# Altium PCB EB2_Cyclone_1_03.PcbDoc (part 4 of 4)
Units mm, origin at the board's own origin, x right, y up, seen from the top; angles counter-clockwise.
Board outline 165.1 x 115.01 mm, 6 copper layers (Top Layer, MidLayer1, VCC Plane, GND Plane, MidLayer2, Bottom Layer); 336 components, 379 nets, 1581 pads, 731 vias.
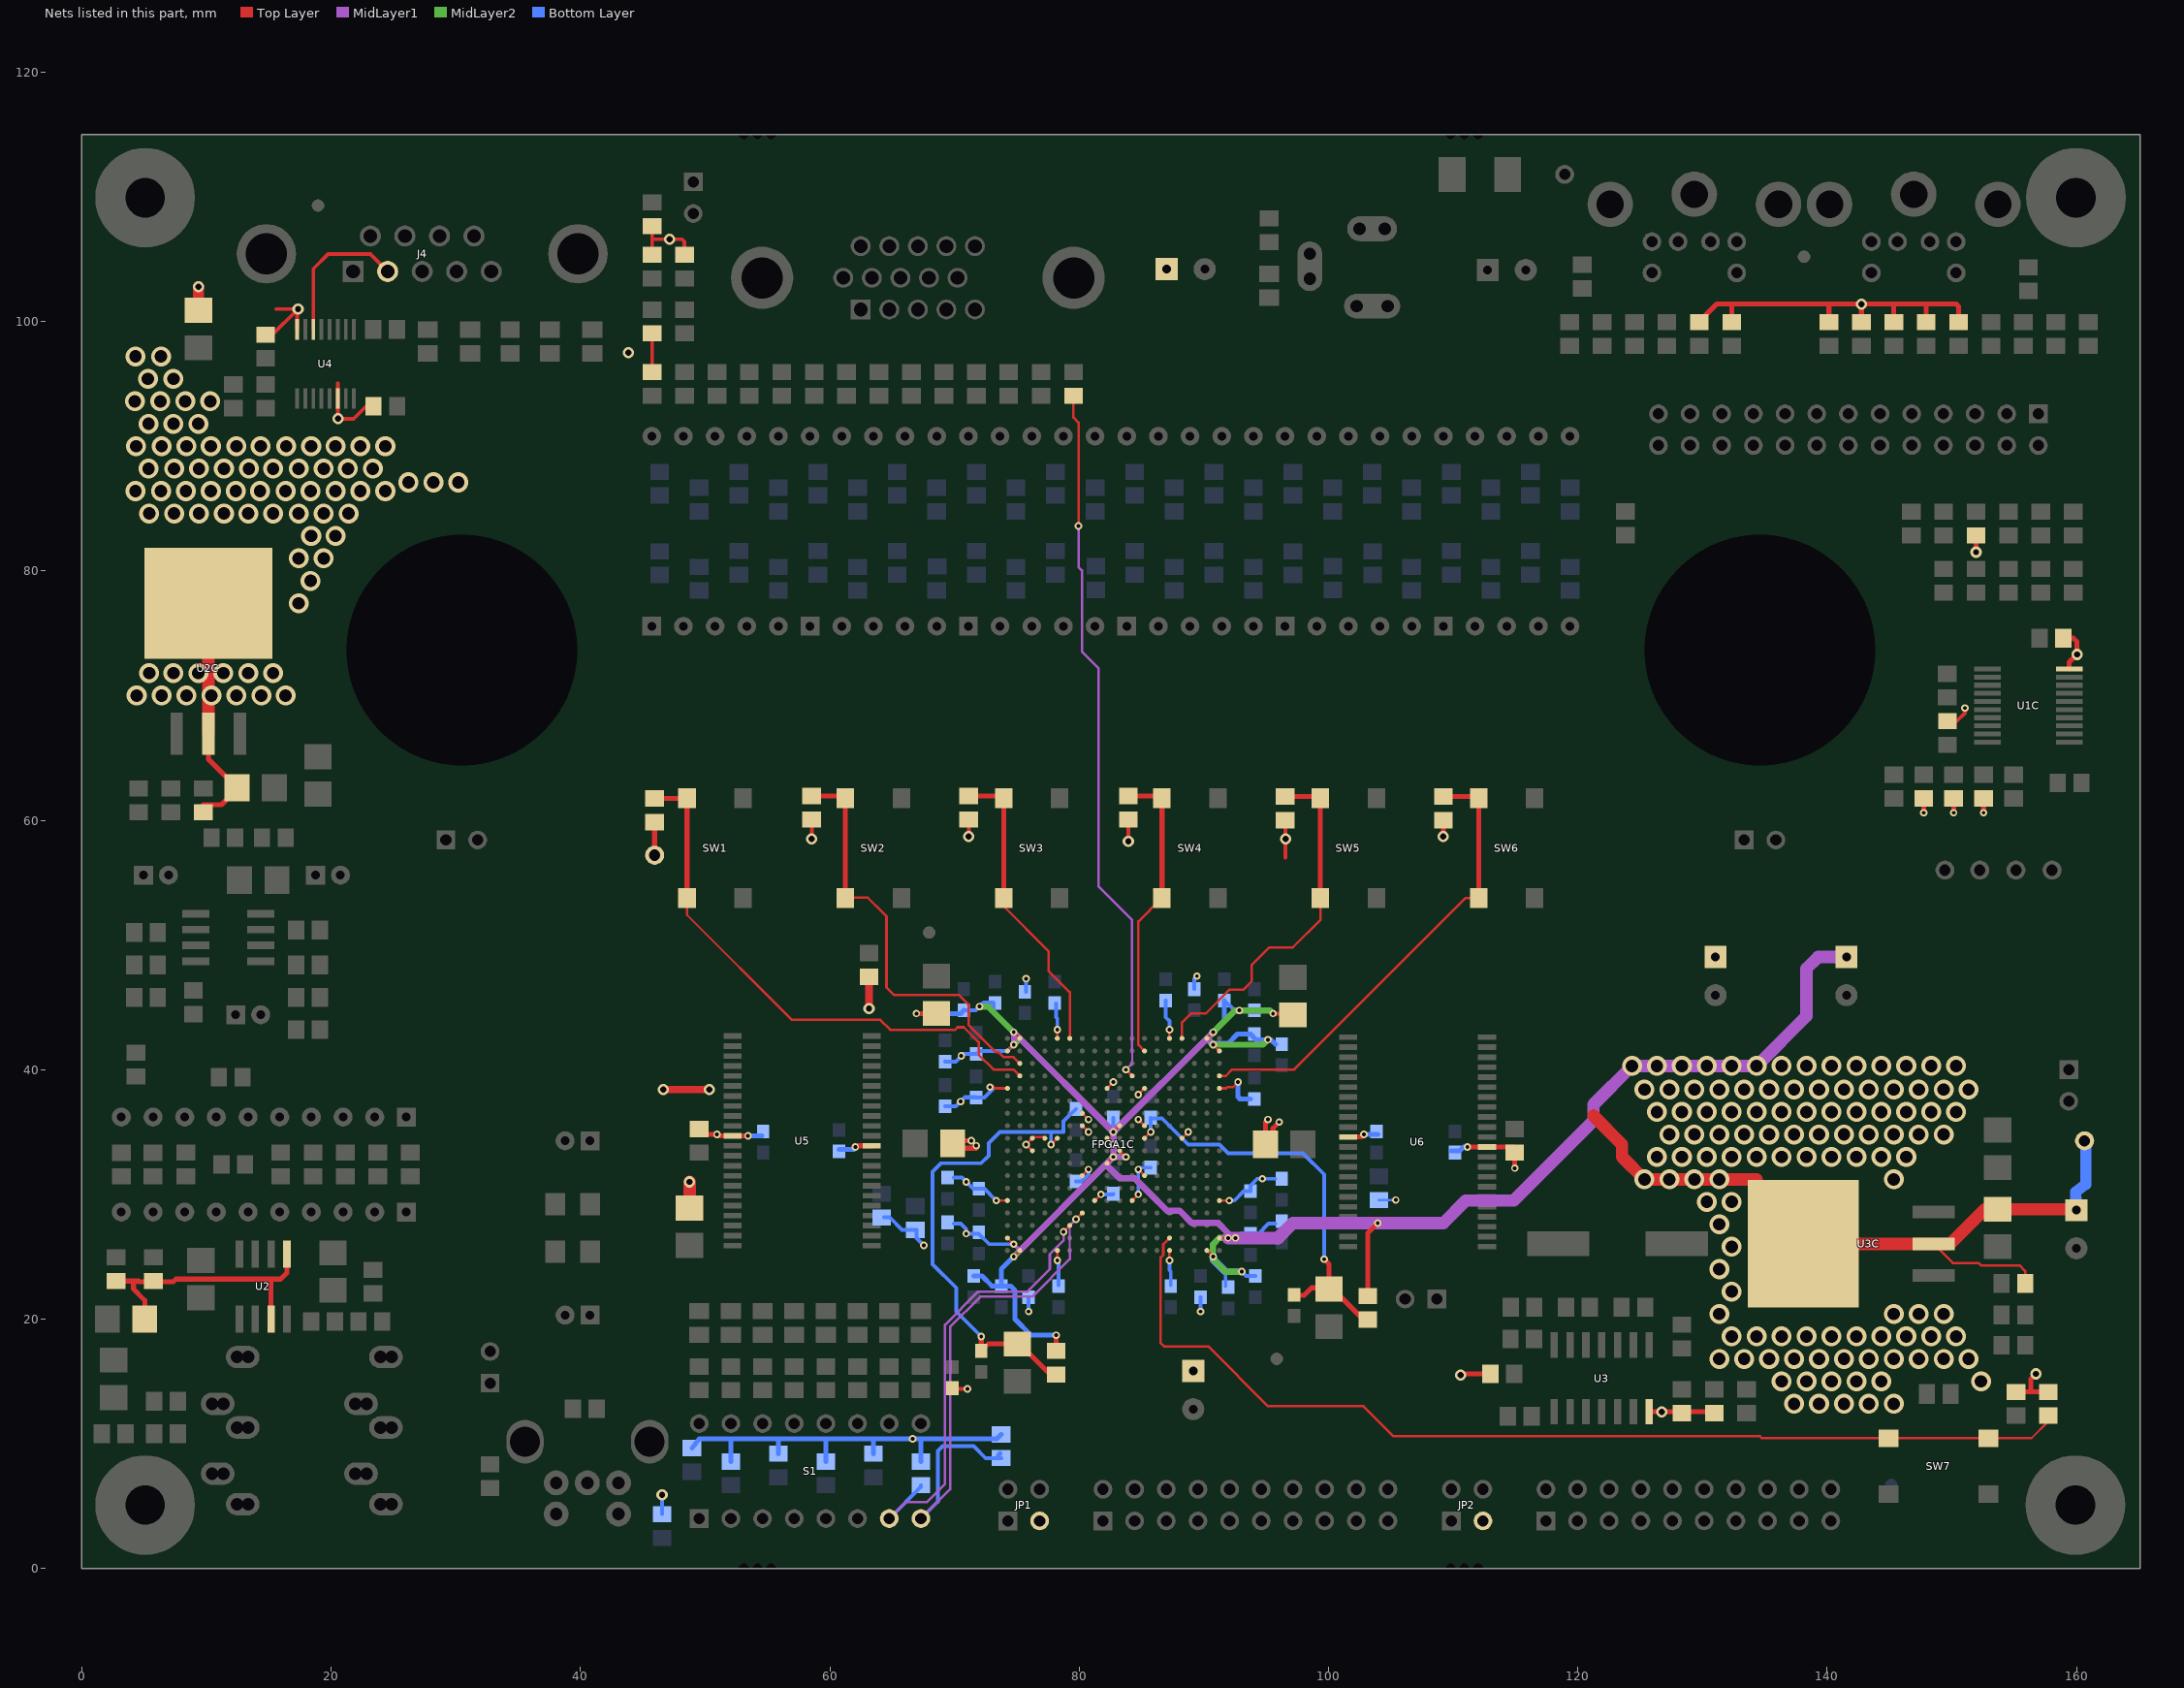
[diagram p8: the nets of this part, all layers, seen from the top]

## Via types
v1: diameter 0.6, hole 0.3, Top Layer to Bottom Layer, tented both sides, 433 vias
v2: diameter 1.6, hole 1, Top Layer to Bottom Layer, 191 vias
v3: diameter 0.9, hole 0.5, Top Layer to Bottom Layer, tented both sides, 105 vias
v4: diameter 1.27, hole 0.7, Top Layer to Bottom Layer, tented both sides, 2 vias

## Nets (pads, with @x,y where several pads share a name; then routed paths per layer and width w, separated by ;. In a path a pad name is that pad's centre, name@x,y a point inside that pad or via, vN(x,y) a via of type N, cw(c..) or ccw(c..) an arc to the next point about the centre after c; other vN are vias at no path point) (continued)
SW_DIP6: FPGA1C.T6 R17.1 S1.7 | length 36.5
  Top Layer w0.2: v1(78.75,27) FPGA1C.T6@79.25,27.5
  MidLayer1 w0.2: S1.7@64.77,4 66.072,5.302 67.786,5.302 69.25,6.766 69.25,19.537 71.913,22.2 75.85,22.2 77.65,24 77.65,25.2 78.75,26.3 v1(78.75,27)
  Bottom Layer w0.3: S1.7@64.77,4 67.31,6.54 R17.1@67.31,6.67
SW_DIP7: FPGA1C.R7 R18.1 S1.8 | length 44.4
  Top Layer w0.2: v1(79.75,28) FPGA1C.R7@80.25,28.5
  MidLayer1 w0.14: 79.25,25.399 79.25,27.5
  MidLayer1 w0.2: S1.8@67.31,4 69.65,6.34 69.65,6.6 69.65,19.372 72.078,21.8 76.25,21.8 79.25,24.8 79.25,25.5 ; 79.25,27.5 v1(79.75,28)
  Bottom Layer w0.2: 68.67,5.32 68.67,5.36
  Bottom Layer w0.3: S1.8@67.31,4 68.67,5.36 ; 68.67,5.32 68.67,9.42 69.05,9.8 71.55,9.8 72.5,8.85 R18.1@73.75,8.85
  Bottom Layer w0.4: S1.8@67.09,4.07 S1.8@67.165,4.145 ; R18.1@73.525,9.075 R18.1@73.66,9.21
SW_TEST: FPGA1C.U14 R21.2 SW7.1 SW7.2 | length 84.1
  Top Layer w0.2: FPGA1C.U14@87.25,26.5 86.75,26 86.75,25.142 86.55,24.942 86.55,18.066 86.816,17.8 90.35,17.8 95.15,13 102.816,13 105.216,10.6 134.616,10.6 134.766,10.45 SW7.2@152.95,10.45 156.4,10.45 157.75,11.8 R21.2@157.75,12.25
SW_USER0: FPGA1C.D2 R9.2 SW1.1 SW1.2 | length 44.8
  Top Layer w0.2: SW1.1@48.55,53.775 48.55,52.4 56.95,44 64.05,44 64.85,43.2 70.05,43.2 70.25,43.4 70.75,43.4 71.95,42.2 71.95,41.197 73.147,40 74.75,40 FPGA1C.D2@75.25,39.5
  Top Layer w0.4: R9.2@45.95,61.75 48.515,61.75 SW1.2@48.55,61.785 SW1.1@48.55,53.775
SW_USER1: FPGA1C.C2 R10.2 SW2.1 SW2.2 | length 34.6
  Top Layer w0.2: SW2.1@61.25,53.8 63.05,53.8 64.25,52.6 64.55,52.3 64.55,46.6 65.15,46 70.35,46 71.15,45.2 71.15,43.566 73.32,41.396 73.554,41.396 73.95,41 74.75,41 FPGA1C.C2@75.25,40.5
  Top Layer w0.4: R10.2@58.55,61.95 61.085,61.95 SW2.2@61.25,61.785 61.25,53.8 SW2.1@61.25,53.775
SW_USER2: FPGA1C.A6 R19.2 SW3.1 SW3.2 | length 24.3
  Top Layer w0.2: SW3.1@73.975,53.775 SW3.1@73.95,53.775 73.95,53.1 77.55,49.5 77.55,47.9 79.25,46.2 FPGA1C.A6@79.25,42.5
  Top Layer w0.4: R19.2@71.15,61.95 73.9,61.95 SW3.2@73.95,62 ; SW3.1@73.95,53.775 SW3.2@73.95,61.785
SW_USER3: FPGA1C.B12 R20.2 SW4.1 SW4.2 | length 23.9
  Top Layer w0.2: FPGA1C.B12@85.25,41.5 84.75,42 84.75,51.875 SW4.1@86.65,53.775
  Top Layer w0.4: R20.2@83.95,61.95 86.5,61.95 SW4.2@86.55,62 ; SW4.1@86.65,53.775 SW4.2@86.65,61.785
SW_USER4: FPGA1C.A15 R22.2 SW5.1 SW5.2 | length 29.2
  Top Layer w0.2: FPGA1C.A15@88.25,42.5 88.25,43.8 88.95,44.5 90.15,44.5 92.049,46.399 93.149,46.399 93.85,47.1 93.85,48.4 95.25,49.8 97.15,49.8 99.35,52 SW5.1@99.35,53.775
  Top Layer w0.4: R22.2@96.52,61.91 99.225,61.91 SW5.2@99.35,61.785 SW5.1@99.35,53.775
SW_USER5: FPGA1C.D18 R23.2 SW6.1 SW6.2 | length 37.6
  Top Layer w0.2: FPGA1C.D18@91.25,39.5 91.784,39.5 92.284,40 97.25,40 111.025,53.775 SW6.1@112.05,53.775
  Top Layer w0.4: R23.2@109.22,61.91 111.925,61.91 SW6.2@112.05,61.785 SW6.1@112.05,53.775
TX: J4.2 U4.14 | length 11.9
  Top Layer w0.3: U4.14@18.575,99.375 18.575,104.225 19.75,105.4 23.15,105.4 J4.2@24.535,104.015
V-232: C23.1 U4.6 | length 6.3
  Top Layer w0.3: 20.525,95.025 U4.6@20.525,93.825 20.525,92.425 v3(20.55,92.2) 21.8,92.2 23.1,93.5 C23.1@23.4,93.8
VAREF: C4.1 R7.2 R8.1 U2.3 U2.5 | length 22.4
  Top Layer w0.4: R8.1@2.75,23.05 4.15,23.05 ; 4.55,23 5.75,23 7.35,23 7.55,23.2 15.15,23.2 ; 4.55,23.05 4.15,23.05 ; C4.1@5.05,20 5.05,21.5 4.15,22.4 4.15,23.05 ; U2.3@15.185,20 15.185,23.165 15.15,23.2 ; U2.5@16.455,25.2 16.455,23.705 16.195,23.445 15.95,23.2 15.15,23.2
  Top Layer w0.6: R7.2@5.75,23.05 5.8,23.05 R7.2@5.95,23.2
VCC: C1C.1 C2C.1 C7C.1 C8C.1 C9C.1 C10C.1 C11C.1 C12C.1 C13C.1 C14C.1 C15C.1 C16C.1 C17C.1 C18.1 C18C.1 C19.1 C19C.1 C20C.1 C21.1 C21C.1 C22C.1 C24.1 C25.2 C26.2 C27.2 C28.2 C29.2 C32C.1 C33C.1 C34C.1 C35C.1 C36C.1 C37C.1 C38C.1 C51C.1 C52C.1 C54C.1 C63C.1 C66C.1 FPGA1C.A5 FPGA1C.A14 FPGA1C.E1 FPGA1C.E9 FPGA1C.E12 FPGA1C.E18 FPGA1C.G7 FPGA1C.H7 FPGA1C.H12 FPGA1C.J3 FPGA1C.J4 FPGA1C.J15 FPGA1C.K3 FPGA1C.M7 FPGA1C.M12 FPGA1C.P1 FPGA1C.P8 FPGA1C.P11 FPGA1C.P18 FPGA1C.V5 FPGA1C.V14 JP1.3 JP2.3 R1C.1 R2C.1 R3C.1 R4C.1 R7C.1 R8C.1 R9.1 R9C.1 R10.1 R10C.1 R11.2 R11C.1 R12.2 R12C.1 R13.2 R13C.1 R14.2 R14C.1 R15.2 R15C.1 R16.2 R16C.1 R17.2 R17C.1 R18.2 R19.1 R20.1 R21.1 R22.1 R23.1 R28C.2 R73.2 R82.1 R96.2 R97.2 R98.2 R99.2 TP6C.1 U1C.20 U2C.2 U2C.4 U3.14 U4.16 U5.11 U5.33 U6.11 U6.33 | length 231.7
  Top Layer w0.2: v1@73.05,38.7 73.25,38.5 FPGA1C.E1@74.25,38.5 ; v1(73.35,29.5) FPGA1C.P1@74.25,29.5 ; FPGA1C.K3@76.25,33.5 v1(75.75,34) FPGA1C.J3@76.25,34.5 76.35,34.6 77.15,34.6 FPGA1C.J4@77.25,34.5 ; v1(78.25,24.7) FPGA1C.V5@78.25,25.5 ; v1(78.25,43.2) FPGA1C.A5@78.25,42.5 v1@78.25,43.3 ; FPGA1C.M7@80.25,31.5 v1(80.75,32) ; FPGA1C.H7@80.25,35.5 v1(80.75,35) ; FPGA1C.G7@80.25,36.5 v1(80.75,36) ; FPGA1C.P8@81.25,29.5 v1(81.75,30) ; FPGA1C.E9@82.25,38.5 v1(82.75,39) ; FPGA1C.P11@84.25,29.5 v1(84.75,30) ; v1(84.75,32) FPGA1C.M12@85.25,31.5 ; v1(84.75,36) FPGA1C.H12@85.25,35.5 ; v1(84.75,38) FPGA1C.E12@85.25,38.5 ; v1(87.25,24.7) FPGA1C.V14@87.25,25.5 ; FPGA1C.A14@87.25,42.5 v1(87.25,43.2) ; FPGA1C.J15@88.25,34.5 v1(88.75,35) ; FPGA1C.P18@91.25,29.5 v1(92.05,29.5) ; FPGA1C.E18@91.25,38.5 91.784,38.5 91.884,38.6 92.35,38.6 v1(92.75,39)
  Top Layer w0.3: C21.1@14.75,98.95 15.3,98.95 v3@17.275,100.925 ; 15.6,101 v3(17.35,101) v3@17.275,100.925 ; U4.16@17.275,99.375 v3@17.275,100.925 ; C24.1@45.75,95.95 R96.2@45.75,99.05 ; R97.2@45.75,105.35 45.75,106.6 ; R99.2@45.75,107.65 45.75,106.6 ; R98.2@48.35,105.35 48.35,106.4 48.15,106.6 v3(47.15,106.6) 45.75,106.6 ; v3(58.55,58.5) R10.1@58.55,60.05 R10.1@58.55,60.1 ; C19C.1@69.885,14.445 69.885,14.395 v1(71.05,14.4) ; v3(71.15,58.7) R19.1@71.15,60.05 ; v3(83.95,58.3) R20.1@83.95,60 ; C1C.1@94.95,34 C1C.1@95.55,34.6 ; R22.1@96.52,60.01 96.55,59.98 v3(96.55,58.5) 96.55,57.05 96.55,57 ; R4C.1@149.653,67.95 150.4,67.95 151.05,68.6 v1(151.05,69)
  Top Layer w0.4: R28C.2@9.75,61.25 11.2,61.25 12.45,62.5 C63C.1@12.45,62.6 10.15,64.9 U2C.2@10.15,66.95 ; TP6C.1@45.95,57.2 R9.1@45.95,59.85 ; C26.2@49.55,34.8 v1(50.95,34.8) 51.06,34.69 U5.11@52.21,34.69 v1(53.44,34.69) ; v1(62.05,33.8) 62.25,33.9 63.36,33.9 U5.33@63.45,33.9 ; C2C.1@69.85,34.3 v1(71.35,34.3) ; C2C.1@69.95,33.7 71.75,33.7 v1(71.75,33.9) ; C1C.1@94.95,34 94.95,35.8 v1(95.15,36) ; C1C.1@95.55,34.6 95.55,35.3 v1(96.05,35.8) ; U6.11@101.575,34.6 102.65,34.6 v1(102.85,34.8) ; v3(109.2,58.7) 109.22,58.72 R23.1@109.22,60.01 ; v3(110.6,15.5) 110.7,15.6 C27.2@113,15.597 ; v1(111.15,33.8) U6.33@112.725,33.8 ; U6.33@112.75,33.8 U6.33@112.725,33.8 ; v1(114.95,32.1) C25.2@114.95,33.3 ; C25.2@114.95,33.8 114.935,33.8 U6.33@112.725,33.8 ; U3.14@125.73,12.565 v3(126.75,12.565) 128.35,12.565 130.435,12.565 R82.1@130.55,12.45 ; R15C.1@129.75,99.95 129.75,100 131.15,101.4 132.35,101.4 ; R14C.1@132.35,100.1 132.35,101.4 ; R16C.1@140.15,99.95 140.15,101.4 ; R13C.1@142.75,99.95 v3(142.75,101.4) ; R12C.1@145.35,99.95 145.35,101.4 ; v1(147.75,60.6) R3C.1@147.75,61.8 ; R17C.1@147.95,99.95 147.95,101.4 ; v1(150.15,60.6) R1C.1@150.15,61.7 ; R11C.1@150.55,99.95 150.55,101.2 150.35,101.4 147.95,101.4 ; v3(151.95,81.5) R10C.1@151.95,82.85 ; v1(152.55,60.6) R2C.1@152.55,61.8 ; R73.2@155.15,14.15 156.35,14.15 ; v3(156.75,15.6) 156.35,15.2 156.35,14.15 ; R21.1@157.75,14.15 156.35,14.15 ; C54C.1@158.85,74.6 C54C.1@158.95,74.6 159.75,74.6 160.05,74.3 v3(160.05,73.3) 159.425,72.675 U1C.20@159.425,72.125 ; 132.35,101.4 140.15,101.4 ; 140.15,101.4 v3(142.75,101.4) ; v3(142.75,101.4) 145.35,101.4 ; 145.35,101.4 147.95,101.4
  Top Layer w0.6: v3(46.65,38.4) 48.45,38.4 v3(50.35,38.4) ; v3(63.15,44.9) C28.2@63.15,47.45
  Top Layer w0.9: C18.1@9.35,100.8 C18.1@9.35,100.9 v3(9.35,102.8)
  Top Layer w1: U2C.4@10.05,74.6 10.15,74.5 10.15,71.8 10.15,70 U2C.2@10.15,66.95 ; C19.1@48.75,28.9 v3(48.75,31)
  Bottom Layer w0.2: v1(92.75,39) 92.75,38 93.1,37.65 C18C.1@93.75,37.65 ; R9C.1@104.053,29.55 v1(105.4,29.55)
  Bottom Layer w0.3: R11.2@46.55,4.35 v3(46.55,5.9) ; R8C.1@64.353,28.15 64.8,28.15 65.8,27.15 66.953,27.15 66.953,26.497 v1(67.55,25.9) ; C37C.1@69.25,37.05 70.1,37.05 70.85,37.8 71.7,37.8 C7C.1@71.75,37.75 ; C36C.1@69.95,31.35 70.6,31.35 71.5,30.45 72.4,30.45 v1(73.35,29.5) ; v1(70.493,37.443) 70.8,37.75 C7C.1@71.75,37.75 ; 73.15,38.5 72.4,37.75 C7C.1@71.75,37.75 ; v1(75.75,47.3) C10C.1@75.75,46.25 ; v1(75.95,20.6) C16C.1@75.95,21.75 ; 78.15,44.2 C11C.1@78.15,45.3 ; v1(78.25,24.7) 78.35,24.6 C33C.1@78.35,22.7 ; v1@78.25,43.3 78.25,44.1 ; C12C.1@79.75,31.05 80.2,31.05 80.75,31.6 v1(80.75,32) ; v1(81.75,30) 82.7,30 C34C.1@82.75,30.05 ; v1(84.75,30) v1(84.75,32) 84.9,32.15 C38C.1@85.75,32.15 ; C8C.1@86.95,45.55 86.95,44.2 87.25,43.9 v1(87.25,43.2) ; v1(87.25,24.7) 87.25,23.9 87.35,23.8 C32C.1@87.35,22.7 ; C9C.1@89.25,46.45 89.25,47.3 v1(89.45,47.5) ; v1(89.75,20.6) C15C.1@89.75,21.75 ; v1(92.05,29.5) 92.45,29.5 93.2,30.25 ; 95.75,31.25 94.3,31.25 93.75,30.7 C17C.1@93.75,30.25 ; C10C.1@75.75,46.25 75.75,47.4 C10C.1@75.75,46.25 ; 93.2,30.25 C17C.1@93.75,30.25 ; 93.2,30.25 C17C.1@93.75,30.25
  Bottom Layer w0.4: R12.2@48.95,9.65 49.55,10.4 52.15,10.4 ; R13.2@52.07,8.57 52.07,10.32 52.15,10.4 ; v1(53.44,34.69) 53.45,34.7 C13C.1@54.55,34.7 ; R14.2@55.88,9.205 55.88,10.27 55.75,10.4 ; R15.2@59.69,8.57 59.69,10.34 59.75,10.4 ; C20C.1@60.75,33.6 60.96,33.6 61.95,33.6 v1(62.05,33.8) ; R16.2@63.5,9.205 63.5,10.35 63.55,10.4 ; R17.2@67.31,8.57 67.31,10.36 67.27,10.4 ; R18.2@73.75,10.75 73.4,10.4 70.15,10.4 67.27,10.4 ; v1(92.75,39) 92.75,37.8 92.9,37.65 C18C.1@93.75,37.65 ; v1(102.85,34.8) C14C.1@103.95,34.8 ; C21C.1@109.85,33.5 109.855,33.5 110.55,33.5 110.85,33.8 v1(111.15,33.8) ; v3@151.85,81.4 v3(151.95,81.5) ; 52.15,10.4 55.75,10.4 ; 55.75,10.4 59.75,10.4 ; 59.75,10.4 63.55,10.4 ; 63.55,10.4 67.27,10.4
  other v1: 66.65,10.4 70.95,31 94.7,31.25 72.85,38.6
  other v2: 4.4,70 6.4,70 8.4,70 10.4,70 12.4,70 14.4,70 16.35,70 5.4,71.8 7.35,71.8 9.35,71.8 11.35,71.8 13.35,71.8 15.35,71.8 17.4,77.4 18.35,79.2 17.4,81 19.4,81 18.4,82.8 20.35,82.8 5.4,84.6 7.4,84.6 9.4,84.6 11.4,84.6 13.35,84.6 15.35,84.6 17.4,84.6 19.4,84.6 21.4,84.6 4.3,86.4 6.35,86.4 8.35,86.4 10.35,86.4 12.35,86.4 14.3,86.4 16.35,86.4 18.35,86.4 20.35,86.4 22.35,86.4 24.35,86.4 26.2,87.1 28.2,87.1 30.2,87.1 5.35,88.2 7.4,88.2 9.4,88.2 11.4,88.2 13.4,88.2 15.35,88.2 17.4,88.2 19.4,88.2 21.35,88.2 23.35,88.2 4.35,90 6.4,90 8.4,90 10.35,90 12.4,90 14.35,90 16.4,90 18.4,90 20.35,90 22.35,90 24.35,90 5.35,91.8 7.35,91.8 9.35,91.8 4.25,93.6 6.3,93.6 8.3,93.6 10.3,93.6 5.3,95.4 7.35,95.4 4.3,97.2 6.35,97.2
  other v3: 43.85,97.5
VCCA_PLL1: C5C.1 C30C.1 C49C.1 FPGA1C.J5 L1C.2 | length 39.6
  Top Layer w0.2: v1(77.75,34) FPGA1C.J5@78.25,34.5
  Top Layer w0.4: v1(72.15,18.6) C49C.1@72.15,17.45 72.7,18 75.25,18 77.7,15.55 L1C.2@78.153,15.55
  Bottom Layer w0.3: v1(72.15,18.6) 70.15,20.6 70.15,22.5 68.25,24.4 68.25,31.8 68.95,32.5 72.15,32.5 72.75,33.1 72.75,34.1 73.65,35 78.75,35 78.75,35.85 C30C.1@79.75,36.85 ; v1(77.75,34) 77.75,35
VCCA_PLL2: C6C.1 C31C.1 C69C.1 FPGA1C.J12 L2C.2 | length 34.3
  Top Layer w0.2: FPGA1C.J12@85.25,34.5 v1(85.75,35)
  Top Layer w0.4: C69C.1@97.15,21.9 98.05,21.9 98.65,22.5 C6C.1@100.05,22.5 ; v1(99.65,24.8) 100.05,24.4 C6C.1@100.05,22.4 100.35,22.4 102.8,19.95 L2C.2@103.153,19.95
  Bottom Layer w0.3: v1(85.75,35) C31C.1@85.75,36.15 85.8,36.1 86.65,36.1 88.75,34 91.25,34 91.95,33.3 97.95,33.3 99.65,31.6 v1(99.65,24.8)
VCCINT: C3C.1 C4C.1 C23C.1 C24C.1 C25C.1 C26C.1 C27C.1 C28C.1 C29C.1 C39C.1 C40C.1 C43C.1 C44C.1 C45C.1 C46C.1 C47C.1 C48C.1 C53C.1 C65C.1 C68C.1 C70C.1 C71C.1 FPGA1C.A2 FPGA1C.A17 FPGA1C.B1 FPGA1C.B18 FPGA1C.H10 FPGA1C.J9 FPGA1C.K10 FPGA1C.L9 FPGA1C.U1 FPGA1C.U18 FPGA1C.V2 FPGA1C.V17 L1C.1 L2C.1 R31C.2 TP7C.1 U3C.2 U3C.4 | length 317.9
  Top Layer w0.2: FPGA1C.U1@74.25,26.5 v1(74.75,26) ; FPGA1C.B1@74.25,41.5 v1(74.75,42) ; v1(74.75,25) FPGA1C.V2@75.25,25.5 ; v1(74.75,43) FPGA1C.A2@75.25,42.5 ; FPGA1C.L9@82.25,32.5 v1(82.75,33) ; FPGA1C.J9@82.25,34.5 v1(82.75,34) ; v1(82.75,35) FPGA1C.H10@83.25,35.5 ; FPGA1C.K10@83.25,33.5 v1(83.75,33) ; FPGA1C.V17@90.25,25.5 v1(90.75,25) ; FPGA1C.A17@90.25,42.5 v1(90.75,43) ; v1(90.75,42) FPGA1C.B18@91.25,41.5 ; FPGA1C.U18@91.25,26.5 v1(91.95,26.5) ; U3C.2@148.55,26.035 150.085,24.5 152.15,24.5 152.35,24.3 155.45,24.3 155.89,23.86 R31C.2@155.89,22.86
  Top Layer w0.3: v1(95.55,44.5) C3C.1@97.15,44.5
  Top Layer w0.4: v1(66.95,44.5) C4C.1@68.55,44.5 ; v1(78.15,18.7) 78.15,17.453 L1C.1@78.153,17.45 ; L2C.1@103.153,21.85 103.153,26.903 v1(103.95,27.7)
  Top Layer w1: 121.25,36.324 121.25,36.3 123.55,34 123.55,33 v2(125.35,31.2) 134.35,31.2 ; U3C.4@141.65,25.9 141.785,26.035 149.885,26.035 152.655,28.805 159.919,28.805 C68C.1@160,28.724
  MidLayer1 w0.3: v1(74.75,25) 75.25,25.5 ; v1(74.75,26) 75.237,25.513 ; 81.7,31.95 v1(82.75,33)
  MidLayer1 w0.4: v1(74.75,42) v1(74.75,43) ; v1(82.75,33) v1(83.75,33) ; 90.265,42.485 v1(90.75,42)
  MidLayer1 w0.5: v1(74.75,43) v1(82.75,35) ; 75.25,25.5 81.7,31.95 v1(82.75,33) v1(82.75,35) ; 82.15,32.4 83.25,31.3 84.45,31.3 87.05,28.7 88.05,28.7 89.05,27.7 91.15,27.7 91.95,26.9 v1(91.95,26.5) ; v1(90.75,43) v1(82.75,35)
  MidLayer1 w1: v1(91.95,26.5) 95.95,26.5 97.15,27.7 109.219,27.7 111.019,29.5 114.85,29.5 121.25,35.9 121.25,36.5 121.25,37.2 v2(124.35,40.3) v2(134.35,40.3) 138.35,44.3 138.35,48.1 139.274,49.024 C53C.1@141.55,49.024
  MidLayer2 w0.4: 86.25,29.5 87.15,28.6 87.45,28.6 87.509,28.659 88.091,28.659 89.05,27.7
  MidLayer2 w0.5: v1(72.012,45.062) 72.688,45.062 v1(74.75,43) v1(82.75,35) v1(90.75,43) 92.5,44.75 v1(92.85,44.75) 95.3,44.75 v1(95.55,44.5) ; v1(74.75,25) v1(82.75,33) ; v1(74.75,42) 75.25,42.5 ; 82.15,32.4 83.25,31.3 84.45,31.3 86.25,29.5 ; v1(82.75,35) v1(82.75,33) ; v1(83.75,33) v1(82.75,33) ; 89.05,27.7 91.15,27.7 91.95,26.9 v1(91.95,26.5) ; 90.25,42.5 v1(90.75,42) 94.75,42 v1(95.15,42.4) ; v1(92.55,26.5) v1(91.95,26.5) ; v1(93.05,23.8) 91.75,23.8 90.75,24.8 v1(90.75,25) 90.75,26 91.25,26.5 v1(91.95,26.5)
  Bottom Layer w0.3: C40C.1@69.25,40.65 70.1,40.65 v1@70.7,41.25 ; 69.95,27.65 70.5,27.65 70.95,27.2 v1(70.95,26.85) 71.95,26.85 72.8,26 v1(74.75,26) ; v1(70.55,41.1) v1@70.7,41.25 ; C28C.1@70.75,44.75 71.7,44.75 72.35,45.4 73.1,45.4 C29C.1@73.15,45.35 ; v1(72.012,45.062) 72.3,45.35 C29C.1@73.15,45.35 ; v1(74.75,42) 74.25,41.5 72,41.5 C23C.1@71.75,41.25 ; v1(74.75,43) 73.15,44.6 C29C.1@73.15,45.35 ; v1(82.75,35) C39C.1@82.75,36.15 ; v1(90.75,25) 91.75,24 C71C.1@91.75,22.65 ; C48C.1@91.65,45.55 92.45,44.75 95.3,44.75 v1(95.55,44.5) ; v1(91.95,26.5) 92.65,26.5 93,26.85 94.4,26.85 95.2,27.65 95.75,27.65 ; v1(93.05,23.8) 93.4,23.45 C25C.1@94.15,23.45 ; v1@70.7,41.25 C23C.1@71.75,41.25 ; v1@70.7,41.25 C23C.1@71.75,41.25
  Bottom Layer w0.4: v1(66.95,44.5) 70.5,44.5 C28C.1@70.75,44.75 ; C26C.1@71.55,23.45 72.2,23.45 73,22.65 74.5,22.65 74.85,22.3 74.85,20 76.15,18.7 v1(78.15,18.7) ; C44C.1@73.75,22.65 73.75,24 v1(74.75,25) v1@74.75,24.9 ; v1(90.75,42) 90.85,42.1 91.95,42.1 92.7,42.85 93.75,42.85 94.2,42.4 95.4,42.4 95.75,42.05 ; v1(90.75,43) 91.65,43.9 C48C.1@91.65,45.55
  Bottom Layer w0.5: v1(90.75,25) 90.75,24.7 91.65,23.8 v1(93.05,23.8)
  Bottom Layer w0.9: C68C.1@160,28.724 159.95,30.2 160.75,30.8 160.75,34.29 160.75,34.4 TP7C.1@160.655,34.29 160.655,34.395 TP7C.1@160.65,34.4
  other v2: 137.35,13.2 139.35,13.2 141.35,13.2 143.35,13.2 145.35,13.2 136.35,15 138.35,15 140.35,15 142.35,15 144.35,15 152.35,15 131.35,16.8 133.35,16.8 135.35,16.8 137.35,16.8 139.35,16.8 141.35,16.8 143.35,16.8 145.35,16.8 147.35,16.8 149.35,16.8 149.35,16.8 151.35,16.8 132.35,18.6 134.35,18.6 136.35,18.6 138.35,18.6 140.35,18.6 142.35,18.6 144.35,18.6 146.35,18.6 148.35,18.6 150.35,18.6 131.35,20.4 145.35,20.4 147.35,20.4 149.35,20.4 132.35,22.2 131.35,24 132.35,25.8 131.35,27.6 130.35,29.4 132.35,29.4 127.35,31.2 129.35,31.2 131.35,31.2 145.35,31.2 126.35,33 128.35,33 130.35,33 132.35,33 134.35,33 136.35,33 138.35,33 140.35,33 142.35,33 144.35,33 146.35,33 127.35,34.8 129.35,34.8 131.35,34.8 133.35,34.8 135.35,34.8 137.35,34.8 139.35,34.8 141.35,34.8 143.35,34.8 145.35,34.8 147.35,34.8 149.35,34.8 126.35,36.6 128.35,36.6 130.35,36.6 132.35,36.6 134.35,36.6 136.35,36.6 138.35,36.6 140.35,36.6 142.35,36.6 144.35,36.6 146.35,36.6 148.35,36.6 150.35,36.6 125.35,38.4 127.35,38.4 129.35,38.4 131.35,38.4 133.35,38.4 135.35,38.4 137.35,38.4 139.35,38.4 141.35,38.4 143.35,38.4 145.35,38.4 147.35,38.4 149.35,38.4 151.35,38.4 126.35,40.3 128.35,40.3 130.35,40.3 132.35,40.3 136.35,40.3 138.35,40.3 140.35,40.3 142.35,40.3 144.35,40.3 146.35,40.3 148.35,40.3 150.35,40.3
VSYNC: FPGA1C.D11 R95.1 | length 56.9
  Top Layer w0.2: R95.1@79.55,94.05 79.55,92.3 79.95,91.9 v1(79.95,83.6) ; v1(83.75,40) FPGA1C.D11@84.25,39.5
  MidLayer1 w0.14: 84.25,40.5 84.25,41.5
  MidLayer1 w0.2: v1(79.95,83.6) 79.95,80.3 80.225,80.025 80.225,73.525 81.55,72.2 81.55,54.7 84.25,52 84.25,41.5 ; v1(83.75,40) 84.25,40.5
pads on no net: FPGA1C.C9 FPGA1C.D4 FPGA1C.D5 FPGA1C.D16 FPGA1C.E5 FPGA1C.E6 FPGA1C.F6 FPGA1C.F7 FPGA1C.F10 FPGA1C.F12 FPGA1C.G6 FPGA1C.G8 FPGA1C.G9 FPGA1C.G10 FPGA1C.G11 FPGA1C.G12 FPGA1C.G13 FPGA1C.H13 FPGA1C.J1 FPGA1C.J13 FPGA1C.K2 FPGA1C.K6 FPGA1C.K15 FPGA1C.K16 FPGA1C.L6 FPGA1C.L7 FPGA1C.L13 FPGA1C.M6 FPGA1C.M8 FPGA1C.M9 FPGA1C.M10 FPGA1C.M11 FPGA1C.N7 FPGA1C.N11 J1C.1 J1C.4 J1C.5 J1C.6 J1C.16 J1C.26 J2.2 J2.8 J3.2 J3.8 J4.9 J5.4 J5.9 J5.11 J5.12 J5.15 U3.10 U3.12

## Polygon pours and split planes (outlines as drawn)
GND on Top Layer "Top Layer-GND" (solid, remove dead copper, pour order 1002): 0,60.832 0,0.032 91.4,0.032 91.4,4.532 89.7,6.232 89.7,9.032 91.4,10.732 91.4,45.932 102.9,45.932 110.6,53.632 165.1,53.632 165.1,115.032 120.8,115.032 120.8,114.132 119,112.332 119,108.032 120.3,106.732 120.3,96.132 121.6,94.832 121.6,61.932 120.5,60.832 117.3,60.832 117.3,62.632 115.8,62.632 115.8,60.832 112.8,60.832 112.8,62.032 108.4,62.032 108.4,60.832 104.6,60.832 104.6,62.632 103.1,62.632 103.1,60.832 100.1,60.832 100.1,62.032 95.7,62.032 95.7,60.832 91.9,60.832 91.9,62.632 90.4,62.632 90.4,60.832 87.4,60.832 87.4,62.032 83.2,62.032 83.2,60.832 79.2,60.832 79.2,62.632 77.7,62.632 77.7,60.832 74.7,60.832 74.7,62.132 70.4,62.132 70.4,60.832 66.5,60.832 66.5,62.632 65,62.632 65,60.832 62,60.832 62,61.932 57.8,61.932 57.8,60.832 53.8,60.832 53.8,62.632 52.3,62.632 52.3,60.832 49.3,60.832 49.3,61.932 45.2,61.932 45.2,60.832 36.2,60.832 36.2,62.932 17.8,62.932 17.8,60.832
VCC on Top Layer "Top Layer-VCC" (solid, remove dead copper, pour order 1001): 0,115 120.6,115 120.6,114.2 118.8,112.4 118.8,107.9 120.1,106.6 120.1,96 121.4,94.7 121.4,62 120.4,61 117.5,61 117.5,62.8 115.6,62.8 115.6,61 113,61 113,62.2 108.2,62.2 108.2,61 104.8,61 104.8,62.8 102.9,62.8 102.9,61 100.3,61 100.3,62.2 95.5,62.2 95.5,61 92.1,61 92.1,62.8 90.2,62.8 90.2,61 87.6,61 87.6,62.2 83,62.2 83,61 79.4,61 79.4,62.8 77.5,62.8 77.5,61 74.9,61 74.9,62.3 70.2,62.3 70.2,61 66.7,61 66.7,62.8 64.8,62.8 64.8,61 62.2,61 62.2,62.1 57.6,62.1 57.6,61 54,61 54,62.8 52.1,62.8 52.1,61 49.5,61 49.5,62.1 45,62.1 45,61 36.4,61 36.4,63.1 17.6,63.1 17.6,61 0,61
VCCINT on Top Layer "Top Layer-VCCINT" (solid, remove dead copper, pour order 1000): 165.1,0 91.6,0 91.6,4.6 89.9,6.3 89.9,8.9 91.6,10.6 91.6,45.7 103,45.7 110.7,53.4 165.1,53.4
VCC on MidLayer1 "MidLayer1-VCC" (solid, remove dead copper, pour order 1004): 0,115 124.5,115 124.5,56.9 111.9,44.3 72.9,44.3 72.9,0 0,0
VCCINT on MidLayer1 "MidLayer1-VCCINT" (solid, remove dead copper, pour order 1003): 73.1,44.08 112,44.08 124.7,56.78 124.7,114.98 165.1,114.98 165.1,-0.02 73.1,-0.02
GND on MidLayer2 "MidLayer2-GND 2" (solid, remove dead copper, pour order 1009): 119.3,115 119.2,67 117.5,65.3 117.5,43.4 165.1,43.4 165.1,115
GND on MidLayer2 "MidLayer2-GND 1" (solid, remove dead copper, pour order 1008): 0,61.6 16.5,61.6 19,59.1 25.4,59.1 27.3,61 35,61 45.2,50.8 45.2,19.6 47.7,17.1 47.7,0 0,0
VCC on MidLayer2 "MidLayer2-VCC" (solid, remove dead copper, pour order 1007): 0,115 0,62 16.7,62 19.3,59.4 25.2,59.4 27.1,61.3 35.2,61.3 45.6,50.9 45.6,44.5 70.6,44.5 70.6,43 117,43 117,65.4 118.8,67.2 118.8,115
VCCINT on MidLayer2 "MidLayer2-VCCINT" (solid, remove dead copper, pour order 1006): 165.1,42.6 71.1,42.6 71.1,0 165.1,0
GND on MidLayer2 "MidLayer2-GND" (solid, remove dead copper, pour order 1005): 48.3,0 48.3,17.7 45.8,20.2 45.8,43.9 70.3,43.9 70.3,0
GND on Bottom Layer "Bottom Layer-GND" (solid, remove dead copper, pour order 1012): 60.8,42.2 60.8,115 165.1,115 165.1,59.15 146.15,59.15 141.6,54.6 128.8,54.6 123.9,49.7 119.35,49.7 108.15,38.5 106.9,38.5 105.5,37.1 105.5,34.55 106.7,33.35 106.7,29 109.1,26.6 109.1,0 0,0 0,42.2
VCC on Bottom Layer "Bottom Layer-VCC" (solid, remove dead copper, pour order 1011): 0,42.672 -0.05,115.112 60.25,115.112 60.25,42.6
VCCINT on Bottom Layer "Bottom Layer-VCCINT" (solid, remove dead copper, pour order 1010): 165.25,-0.1 165.25,58.6 149.3,58.6 148.75,58.05 147.05,58.05 142.25,53.25 129.45,53.25 124.55,48.35 119.9,48.35 108.35,36.8 105.65,36.8 105.65,36.1 106.35,35.4 106.35,34.5 107.2,33.65 107.2,28.8 109.65,26.35 109.65,-0.1
VCC on VCC Plane (split plane): 164.298,0.802 0.802,0.802 0.802,114.209 164.298,114.209
GND on GND Plane (split plane): 164.298,0.802 48.15,0.802 48.15,22.7 48.147,22.729 48.144,22.759 48.127,22.815 48.117,22.833 48.099,22.867 48.079,22.892 48.062,22.912 47.15,23.824 47.15,35.7 47.147,35.729 47.144,35.759 47.127,35.815 47.117,35.833 47.099,35.867 47.079,35.892 47.062,35.912 45.65,37.324 45.65,41.976 47.062,43.388 47.079,43.408 47.099,43.433 47.117,43.467 47.127,43.485 47.144,43.541 47.147,43.571 47.15,43.6 47.15,53.176 49.362,55.388 49.379,55.408 49.399,55.433 49.417,55.467 49.427,55.485 49.444,55.541 49.447,55.571 49.45,55.6 49.45,60.8 49.444,60.859 49.427,60.915 49.399,60.967 49.362,61.012 49.317,61.049 49.265,61.077 49.209,61.094 49.15,61.1 49.091,61.094 49.035,61.077 48.983,61.049 48.938,61.012 48.901,60.967 48.873,60.915 48.856,60.859 48.85,60.8 48.85,55.724 46.638,53.512 46.601,53.467 46.573,53.415 46.556,53.359 46.553,53.329 46.55,53.3 46.55,43.724 45.138,42.312 45.101,42.267 45.073,42.215 45.056,42.159 45.053,42.129 45.05,42.1 45.05,37.2 45.053,37.171 45.056,37.141 45.073,37.085 45.101,37.033 45.138,36.988 46.55,35.576 46.55,23.7 46.553,23.671 46.556,23.641 46.573,23.585 46.601,23.533 46.638,23.488 47.55,22.576 47.55,0.802 0.802,0.802 0.802,114.209 164.298,114.209

## Keep-outs
Top Layer:
  circle w0.254: c134.62,73.66 r12.141
  circle w0.254: c30.48,73.66 r12.141
  lines w0.2: 44.55,45 44.55,25.8 47.65,22.7 47.65,0
  lines w0.4: 117.15,24.6 117.15,23.4 129.15,23.4 129.15,24.6 ; 117.15,27.6 117.15,28.8 129.15,28.8 129.15,27.6
Bottom Layer:
  circle w0.2: c145.15,6.7 r2
  lines w0.2: 44.95,0.3 44.95,5.15
Keep-Out Layer:
  the board outline again, w0.8

## Other copper
Top Layer:
  region net VCC: 4.68,83.2 4.68,72.1 15.75,72.1 15.75,83.2
  rectangle net VCCINT: 133.55,20.2 143.95,31.8
VCC Plane (plane layer: these items are gaps in the copper):
  lines w1.8: 10.45,7.6 11.35,7.6 ; 10.45,13.2 11.35,13.2 ; 12.45,5.15 13.35,5.15 ; 12.45,11.3 13.35,11.3 ; 12.45,16.95 13.35,16.95 ; 21.95,7.6 22.85,7.6 ; 21.95,13.2 22.85,13.2 ; 23.95,5.15 24.85,5.15 ; 23.95,11.3 24.85,11.3 ; 23.95,16.95 24.85,16.95 ; 98.505,103.435 98.505,105.435 ; 102.255,101.235 104.755,101.235 ; 102.505,107.435 104.505,107.435
GND Plane (plane layer: these items are gaps in the copper):
  lines w0.254: 11.799,4.302 cw(c12.696,5.138) 11.818,5.994 ; 12.319,4.191 13.462,4.191 ; 12.338,6.109 13.481,6.109 ; 13.982,4.306 ccw(c13.104,5.162) 14.001,5.998 ; 23.299,4.302 cw(c24.196,5.138) 23.318,5.994 ; 23.819,4.191 24.962,4.191 ; 23.838,6.109 24.981,6.109 ; 25.482,4.306 ccw(c24.604,5.162) 25.501,5.998 ; 97.536,103.251 97.536,105.537 ; 97.622,102.762 ccw(c98.478,103.641) 99.314,102.743 ; 97.622,106.064 cw(c98.458,105.167) 99.314,106.045 ; 99.441,103.251 99.441,105.537 ; 101.876,106.552 cw(c102.773,107.388) 101.895,108.244 ; 102.403,106.466 104.689,106.466 ; 102.403,108.371 104.689,108.371 ; 105.178,106.552 ccw(c104.299,107.408) 105.197,108.244
  lines w0.597: 47.85,-0.1 47.85,22.7 46.85,23.7 46.85,35.7 45.35,37.2 45.35,42.1 46.85,43.6 46.85,53.3 49.15,55.6 49.15,60.8
  lines w1.8: 10.45,7.6 11.35,7.6 ; 10.45,13.2 11.35,13.2 ; 12.45,11.3 13.35,11.3 ; 12.45,16.95 13.35,16.95 ; 21.95,7.6 22.85,7.6 ; 21.95,13.2 22.85,13.2 ; 23.95,11.3 24.85,11.3 ; 23.95,16.95 24.85,16.95 ; 102.255,101.235 104.755,101.235

## Silkscreen, mask and mechanical layers (free items; w line width, h text height)
Top Overlay:
  circle w1: c96.95,111.254 r0.458
  circle w0.508: c134.62,73.66 r10
  circle w0.508: c30.48,73.66 r10
  circle w0.254: c159.918,5.08 r4
  circle w0.254: c5.08,5.08 r4
  circle w0.254: c5.08,109.931 r4
  circle w0.254: c159.969,109.931 r4
  rectangle: 44.55,63 57.05,73.5
  rectangle: 57.25,63 69.75,73.5
  rectangle: 69.95,63 82.45,73.5
  rectangle: 82.65,63 95.15,73.5
  rectangle: 95.35,63 107.85,73.5
  rectangle: 108.05,63 120.55,73.5
  lines w0.08: 40.15,14.1 48.35,14.1 ; 48.35,14.1 47.65,14.2 47.65,14 48.35,14.1
  lines w0.1: 2.2,34.1 2.2,38.2 ; 6.7,34.1 6.7,38.2 ; 7.3,34.1 7.3,38.2 ; 15,34.2 15,38.2 ; 19.5,34.2 19.5,38.2 ; 21.9,34.3 21.9,38.2 ; 24.5,34.3 24.5,38.2 ; 27.1,34.3 27.1,38.2 ; 47.3,97.6 47.7,97.6 48,97.3 48,96.9 ; 62.4,93.4 62.75,93.05 80.85,93.05 81.3,93.5 81.85,93.5 ; 85.7,94.3 80.8,94.3 ; 153.9,76.5 153.9,77.3 ; 157.6,77.3 158.8,76.1 159.8,76.1 ; 80.8,94.3 81.5,94.4 81.5,94.2 80.8,94.3
  lines w0.2: 1.605,30.075 1.605,34.795 ; 27.605,30.075 27.605,34.795 ; 93.013,111.254 94.029,111.254 ; 93.521,110.746 93.521,111.762 ; 94.537,111.254 96.061,111.254 ; 95.47,110.4 ccw(c96.95,111.254) 95.47,112.108
  text "GND" at 47.369,113.1 h1.2
  text "5 VDC" at 86.106,110.617 h1.5
  text "PWR" at 93.853,99.568 h1.1
  text "CTS" at 26.6,94.6 h0.8
  text "RTS" at 30.1,94.6 h0.8
  text "RXD" at 36.5,94.6 h0.8
  text "TXD" at 39.9,94.6 h0.8
  text "GND" at 157.7,41.7 h1.2
  text "GND" at 31.269,19.2 h1.2
  text "GND" at 105.9,18.7 h1.2
  text "LOADED" at 147,11.7 h0.8
  text "USER HEADER A" at 91.95,9.8 h1.2
  text "USER HEADER B" at 117.05,9.8 h1.2
  text "TEST/RESET" at 143.35,3.1 h1.2
  text "LINE" at 10.25,2.3 h1.2
  text "HEAD" at 21.35,2.3 h1.2
  text "5V" at 73.05,1 h0.8
  text "3V3" at 75.75,1 h0.8
  text "5V" at 108.65,1 h0.8
  text "3V3" at 111.35,1 h0.8
  text "VOLUME" at 30.3,0.9 h1.2
  text "OUT" at 10.55,0.6 h1.2
  text "PHONE" at 20.75,0.5 h1.2
Bottom Overlay:
  lines w0.1: 72.7,41.9 73.5,41.9 ; 72.9,26.3 73.5,26.3 ; 80.1,26.9 80.1,30.3 ; 82.4,26.9 82.4,29.3 ; 82.4,38.7 82.4,41.1 ; 85.4,31.4 85.4,30.3 86.3,29.4 ; 85.4,38.7 85.4,41.1
Unplated Route Details:
  lines w2.4: 0,-1.2 51.7,-1.2 ; 0,116.211 51.7,116.211 ; 56.7,-1.2 108.4,-1.2 ; 56.7,116.211 108.4,116.211 ; 113.4,-1.2 165.1,-1.2 ; 113.4,116.211 165.1,116.211
Unit PCB Boundaries:
  the board outline again, w0.2
  text "Unit PCB boundaries coincide with centre-lines of tracks" at 0,-8 h0.75
Gerber ID:
  text ".Layer_Name" at 0,-6 h0.75
Dimensions:
  text "Dimensions in millimetres" at 0,-10 h0.75
Design Information:
  drawing of 719 lines, arcs and shapes, not listed
  text "EB2 REV1.03" at 313.547,253.474 h1.27
  text "DESIGN INFORMATION" at 257.54,253.347 h1.52
  text "BOARD NAME:" at 295.132,253.347 h1.52
  text "BOARD TECHNOLOGY" at 257.54,250.807 h1.52
  text "BOARD SIZE (REFER ALSO PROFILING INFORMATION)" at 305.8,250.807 h1.27
  text "115.01mm" at 313.52,248.533 h1.52
  text "11.811" at 273.339,248.445 h1.52
  text "165.10mm" at 336.52,248.433 h1.52
  text "7.874" at 287.309,248.318 h1.52
  text "5.000" at 260.366,248.267 h1.52
  text "(Unit)" at 352.59,248.209 h1.52
  text "X" at 329.469,247.759 h1.78
  text "(MIN. TRACK/   PADS  /CLEARANCE IN 0.001'')" at 256.016,245.727 h1.27
  text "MINIMUM ANNULAR RING 0.05MM (0.002'') EXTERNAL PER IPC-2221 CLASS 3 LEVEL C AND IS THE" at 257.54,243.187 h1.27
  text "MANUFACTURING REGISTRATION ALLOWANCE" at 257.54,240.901 h1.27
  text "LAND SIZE CALCULATION MINIMUM - NOMINAL HOLE SIZE + 0.508MM (0.020'')" at 257.54,238.107 h1.27
  text "AS INSTRUCTED" at 343.57,233.713 h1.52
  text "X" at 295.183,233.586 h1.52
  text "CIRCUIT TYPE:" at 257.54,233.535 h1.52
  text "SS" at 280.4,233.535 h1.27
  text "DS" at 298.18,233.535 h1.27
  text "X" at 312.785,233.535 h1.52
  text "PTH" at 315.96,233.535 h1.27
  text "ML" at 326.882,233.535 h1.27
  text "X" at 330.692,233.535 h1.52
  text "No. OFF" at 333.74,233.535 h1.27
  text "FINGER CONNECTOR DIM PER:" at 257.54,230.487 h1.52
  text "AS SHOWN" at 333.74,230.487 h1.27
  text "No. OFF TOTAL" at 274.304,227.693 h1.52
  text "ONE SIDE" at 315.96,227.693 h1.27
  text "BOTH SIDES" at 333.74,227.439 h1.27
  text "VIAS:" at 257.54,224.772 h1.52
  text "NONE" at 268.97,224.772 h1.14
  text "X" at 277.352,224.772 h1.52
  text "FEED THRU'" at 280.4,224.772 h1.14
  text "X" at 295.132,224.772 h1.52
  text "TENTED" at 298.18,224.772 h1.14
  text "BURIED LAYER SEQUENCE" at 315.96,224.772 h1.14
  text "UNIQUE DRILL" at 280.4,221.724 h1.14
  text "2 SIZE" at 298.18,221.724 h1.14
  text "BLIND LAYER SEQUENCE" at 315.96,221.724 h1.14
  text "Layer Stack Manager (Protel)" at 292.973,219.438 h1.27
  text "X" at 330.692,219.438 h1.52
  text "AS SHOWN" at 333.74,219.438 h1.27
  text "LAYER CONSTRUCTION PER:" at 257.54,219.311 h1.52
  text "Protel" at 338.566,216.771 h1.27
  text "(PFW)" at 348.853,216.644 h1.27
  text "ARTWORK:" at 257.54,216.517 h1.52
  text "MANUAL" at 280.4,216.517 h1.27
  text "DIGITISED" at 298.18,216.517 h1.27
  text "X" at 312.912,216.517 h1.52
  text "CAD" at 315.96,216.517 h1.27
  text "TYPE" at 326.882,216.517 h1.27
  text "ARTWORK/PATTERN MASTER LIST" at 257.54,211.818 h1.52
  text "DESCRIPTION" at 258.81,209.405 h1.27
  text "DRAWING No./CAD FILE REF." at 277.479,209.405 h1.27
  text "LAYER NAME" at 318.754,209.405 h1.27
  text "GERBER FILE REF" at 339.506,209.329 h1.27
  text "PCB FILE" at 257.256,206.941 h1.27
  text "EB_Cyclone_1_03" at 277.627,206.865 h1.27
  text "PcbDoc" at 308.869,206.865 h1.02
  text "Top Paste Mask" at 317.048,204.401 h1.02
  text "GTP" at 359.669,204.325 h1.27
  text "GERBER FILE" at 257.256,204.274 h1.27
  text "GTO" at 359.618,201.836 h1.27
  text "Top Overlay" at 317.048,201.81 h1.02
  text "GERBER FILE" at 257.256,201.734 h1.27
  text "Top Solder Mask" at 317.048,199.372 h1.02
  text "GTS" at 359.669,199.245 h1.27
  text "GERBER FILE" at 257.256,199.194 h1.27
  text "TOP LAYER" at 317.048,196.781 h1.02
  text "GTL" at 359.669,196.705 h1.27
  text "GERBER FILE" at 257.256,196.654 h1.27
  text "GERBER FILE" at 257.256,194.114 h1.27
  text "MIDLAYER1" at 317.19,194.109 h1.02
  text "G1" at 359.69,194.109 h1.27
  text "INTERNALPLANE1" at 317.048,191.741 h1.02
  text "GERBER FILE" at 257.256,191.574 h1.27
  text "GP1" at 359.669,191.565 h1.27
  text "INTERNALPLANE2" at 317.048,189.201 h1.02
  text "GP2" at 359.618,189.076 h1.27
  text "GERBER FILE" at 257.256,189.034 h1.27
  text "MIDLAYER2" at 317.048,186.661 h1.02
  text "GERBER FILE" at 257.256,186.494 h1.27
  text "G2" at 359.69,186.509 h1.27
  text "BOTTOMLAYER" at 317.048,184.101 h1.02
  text "GBL" at 359.669,184.025 h1.27
  text "GERBER FILE" at 257.256,183.954 h1.27
  text "Bottom Solder Mask" at 317.048,181.612 h1.02
  text "GBS" at 359.669,181.485 h1.27
  text "GERBER FILE" at 257.256,181.414 h1.27
  text "Bottom Overlay" at 317.048,179.021 h1.02
  text "GBO" at 359.669,178.945 h1.27
  text "GERBER FILE" at 257.256,178.874 h1.27
  text "Bottom Paste Mask" at 317.048,176.532 h1.02
  text "GBP" at 359.669,176.405 h1.27
  text "GERBER FILE" at 257.256,176.334 h1.27
  text "PCB Boundary" at 317.048,173.941 h1.02
  text "GM5" at 359.669,173.865 h1.27
  text "GERBER FILE" at 257.256,173.794 h1.27
  text "Peelable Solder Mask" at 317.048,171.401 h1.02
  text "GM2" at 359.669,171.325 h1.27
  text "GERBER FILE" at 257.256,171.254 h1.27
  text "Unplated Route Details" at 317.048,168.861 h1.02
  text "GM3" at 359.669,168.785 h1.27
  text "GERBER FILE" at 257.256,168.714 h1.27
  text "Plated Route Details" at 317.048,166.321 h1.02
  text "GM4" at 359.669,166.245 h1.27
  text "GERBER FILE" at 257.256,166.174 h1.27
  text "APERTURE LIST" at 257.256,163.811 h1.27
  text "APR" at 309.869,163.735 h1.27
  text "DRILL REPORT" at 257.256,161.271 h1.27
  text "DRR" at 309.869,161.195 h1.27
  text "EXCELLON DRILL" at 257.256,158.731 h1.27
  text "TXT" at 309.869,158.655 h1.27
  text "MATERIAL:" at 257.54,150.731 h1.52
  text "GLASS FIBRE EPOXY RESIN NEMA GRADE FR4 (MIL-S-13949H)" at 283.194,150.477 h1.27
  text "X" at 280.527,150.35 h1.52
  text "THICKNESS:" at 265.414,147.556 h1.27
  text "0.8mm" at 283.194,147.556 h1.27
  text "1.2mm" at 300.847,147.556 h1.27
  text "1.6mm" at 318.5,147.556 h1.27
  text "2.4mm" at 336.28,147.556 h1.27
  text "3.2mm" at 354.06,147.556 h1.27
  text "X" at 316.087,147.429 h1.52
  text "TOLERANCE:" at 265.287,144.508 h1.27
  text "IN A/W IPC-D-300G CLASS" at 282.94,144.508 h1.27
  text "3 LEVEL B" at 317.865,144.508 h1.27
  text "OTHER +/-" at 336.28,144.508 h1.27
  text "X" at 280.527,144.381 h1.52
  text "BOW & TWIST:" at 262.874,141.46 h1.27
  text "IN A/W IPC-D-300G CLASS" at 282.94,141.46 h1.27
  text "3 LEVEL B" at 317.865,141.46 h1.27
  text "AS SHOWN" at 336.407,141.333 h1.27
  text "X" at 280.527,141.206 h1.52
  text "COPPER THICKNESS (FINISHED)" at 265.287,138.158 h1.27
  text "OUTER:" at 270.113,135.872 h1.27
  text "18um" at 283.194,135.872 h1.27
  text "35um" at 310.245,135.872 h1.27
  text "70um" at 336.534,135.872 h1.27
  text "X" at 307.502,135.669 h1.52
  text "INNER SIGNAL:" at 261.731,132.824 h1.27
  text "18um" at 283.194,132.824 h1.27
  text "35um" at 310.245,132.824 h1.27
  text "70um" at 336.534,132.824 h1.27
  text "X" at 307.451,132.621 h1.52
  text "INNER PWR:" at 265.414,129.776 h1.27
  text "18um" at 283.194,129.776 h1.27
  text "35um" at 310.245,129.776 h1.27
  text "70um" at 336.534,129.776 h1.27
  text "X" at 307.578,129.649 h1.52
  text "STRUCTURE:" at 257.54,126.728 h1.52
  text "REFER" at 283.194,126.728 h1.27
  text "AS PER DRAWING No." at 283.067,123.553 h1.27
  text "AS SHOWN" at 336.407,123.553 h1.27
  text "X" at 333.867,123.426 h1.52
  text "DRILLING:" at 257.54,120.759 h1.52
  text "VIEWED FROM:" at 262.493,118.473 h1.27
  text "COMPONENT SIDE" at 283.194,118.473 h1.14
  text "SOLDER SIDE" at 309.991,118.473 h1.14
  text "X" at 280.527,118.219 h1.52
  text "REFERENCE:" at 264.779,115.425 h1.27
  text "AS SHOWN" at 283.067,115.298 h1.14
  text "PATTERN MASTER LIST" at 310.118,115.298 h1.14
  text "X" at 333.867,115.298 h1.52
  text "NC_DRILL FILES" at 336.407,115.298 h1.14
  text "X" at 280.527,115.171 h1.52
  text "PTH MINIMUM COPPER THICKNESS:" at 270.621,112.377 h1.27
  text "20um" at 310.245,112.377 h1.27
  text "X" at 307.578,112.25 h1.52
  text "OTHER" at 336.407,112.25 h1.27
  text "NPTH:" at 271.129,109.329 h1.27
  text "TENTED" at 283.067,109.202 h1.14
  text "X" at 307.578,109.202 h1.52
  text "PADS REMOVED" at 310.118,109.202 h1.14
  text "REMOVE PADS" at 336.407,109.202 h1.14
  text "X" at 280.527,109.075 h1.52
  text "2nd DRILL" at 283.067,106.154 h1.14
  text "BOTH" at 310.118,106.154 h1.14
  text "AS SHOWN" at 322.437,106.154 h1.14
  text "NONE" at 336.407,106.154 h1.14
  text "BOARD FINISH:" at 257.54,103.233 h1.52
  text "X" at 280.527,103.106 h1.52
  text "ETCHING" at 283.067,103.106 h1.14
  text "REFER PATTERN MASTER LIST" at 310.118,103.106 h1.14
  text "LEGEND / SCREEN PRINT:" at 277.86,100.185 h1.27
  text "NONE" at 310.118,100.058 h1.14
  text "COMPONENT" at 322.437,100.058 h1.14
  text "SOLDER" at 336.407,100.058 h1.14
  text "X" at 319.897,99.931 h1.52
  text "X" at 333.867,99.931 h1.52
  text "COLOUR:" at 268.081,97.137 h1.27
  text "WHITE" at 283.067,97.01 h1.14
  text "YELLOW" at 310.118,97.01 h1.14
  text "OTHER" at 336.407,97.01 h1.14
  text "X" at 280.527,96.883 h1.52
  text "X" at 280.527,93.962 h1.52
  text "LIQUID PHOTOIMAGEABLE" at 283.067,93.962 h1.14
  text "SCREEN PRINT" at 322.437,93.962 h1.14
  text "MATTE" at 283.067,90.914 h1.14
  text "GLOSS" at 295.767,90.914 h1.14
  text "GREEN" at 310.118,90.914 h1.14
  text "BLUE" at 322.437,90.914 h1.14
  text "G/Y" at 336.407,90.914 h1.14
  text "OTHER" at 347.837,90.914 h1.14
  text "X" at 293.1,90.787 h1.52
  text "SOLDER MASK COLOUR:" at 257.54,87.993 h1.14
  text "BLACK" at 283.067,87.866 h1.14
  text "GREEN" at 295.767,87.866 h1.14
  text "YELLOW" at 310.118,87.866 h1.14
  text "BLUE" at 322.437,87.866 h1.14
  text "OTHER" at 336.407,87.866 h1.14
  text "X" at 280.4,87.739 h1.52
  text "TRACK FINISH:" at 257.54,84.945 h1.52
  text "SELECTIVE SOLDER (HASL)" at 283.067,84.818 h1.14
  text "REFLOW SOLDER" at 322.437,84.818 h1.14
  text "SELECTIVE GOLD" at 283.067,81.77 h1.14
  text "um  (AREA" at 310.118,81.77 h1.14
  text "sq. mm)" at 337.931,81.77 h1.14
  text "IMMERSION GOLD" at 330.69,79.409 h1.27
  text "REFER PATTERN MASTER LIST" at 283.067,78.722 h1.14
  text "OTHER" at 322.437,78.722 h1.14
  text "X" at 319.927,78.718 h1.52
  text "EDGE BOARD" at 257.54,75.801 h1.52
  text "1.3um HARD GOLD OVER 5um     NICKEL / TIN-NICKEL" at 283.067,75.674 h1.14
  text "CONTACTS:" at 257.54,73.642 h1.52
  text "HARD FINISH GOLDE PLATE" at 283.067,72.626 h1.14
  text "OTHER" at 322.437,72.626 h1.14
  text "AS SHOWN" at 283.067,69.578 h1.14
  text "REFER" at 322.437,69.578 h1.14
  text "PROFILING:" at 257.54,66.53 h1.52
  text "AS DIMENSIONED, MEASURED AND CUT FROM SPECIFIED DATUM." at 283.067,66.53 h1.14
  text "X" at 280.527,66.403 h1.52
  text "REFER PCB BLANK DWG No." at 283.194,63.609 h1.27
  text "USE PROFILE / ROUTE TAPE SUPPLIED (REFER PATTERN MASTER LIST)" at 283.194,60.561 h1.27
  text "SQUARE CUT" at 283.194,57.513 h1.27
  text "N.C. ROUTE" at 300.974,57.513 h1.27
  text "V. SCORE" at 318.754,57.513 h1.27
  text "BLANK" at 336.534,57.513 h1.27
  text "ACCEPTABILITY:" at 257.54,54.846 h1.52
  text "MATERIALS AND WORKMANSHIP FOR ALL PRINTED WIRING BOARDS TO MEET" at 279.765,54.719 h1.27
  text "OR EXCEED THE REQUIREMENTS OF:" at 279.765,51.925 h1.27
  text "IPC-6011/12 AND IPC-A-600E" at 283.321,49.258 h1.27
  text "1" at 318.881,49.258 h1.27
  text "2" at 327.771,49.258 h1.27
  text "X" at 325.104,49.131 h1.52
  text "X" at 280.654,49.004 h1.52
  text "3" at 336.661,47.099 h1.27
  text "UL CERTIFICATION" at 283.321,46.21 h1.27
  text "AUSTEL" at 318.881,46.21 h1.27
  text "X" at 280.654,46.083 h1.52
  text "ML-P-55110F GRP" at 282.813,43.162 h1.02
  text "A" at 301.101,43.162 h1.27
  text "B" at 309.991,43.162 h1.27
  text "AS2546" at 318.881,43.162 h1.27
  text "OTHER" at 336.661,43.162 h1.27
  text "ADDITIONAL" at 257.54,40.241 h1.52
  text "NONE" at 283.321,39.987 h1.27
  text "SAMPLE PLAN" at 301.101,39.987 h1.27
  text "MIL-P-55110E SERIAL Nos. PER ORDER" at 318.881,39.987 h1.27
  text "REQUIREMENTS:" at 257.54,37.828 h1.52
  text "NONE" at 283.321,36.939 h1.27
  text "ML-P-55110F GRP" at 300.593,36.939 h1.02
  text "A" at 318.881,36.939 h1.27
  text "B" at 327.771,36.939 h1.27
  text "IPC CLASS:" at 333.74,36.939 h1.27
  text "1" at 349.234,36.939 h1.27
  text "2" at 355.584,36.939 h1.27
  text "3" at 361.934,36.939 h1.27
  text "QUALITY RELEASE REPORT" at 301.101,33.891 h1.27
  text "OTHER" at 341.614,33.891 h1.27
  text "PER ORDER" at 350.123,33.764 h1.27
  text "X" at 338.947,33.637 h1.52
  text "NONE" at 301.101,30.843 h1.27
  text "REQUIRED" at 318.881,30.843 h1.27
  text "PER ORDER" at 341.741,30.843 h1.27
  text "ELECTRICAL TEST:" at 257.54,30.716 h1.52
  text "X" at 316.214,30.716 h1.52
  text "NONE" at 301.101,27.795 h1.27
  text "1 SIDE" at 318.754,27.795 h1.14
  text "2 SIDES" at 329.93,27.795 h1.14
  text "MIN. PITCH" at 341.614,27.795 h1.27
  text "0.65mm" at 355.203,27.795 h1.27
  text "SURFACE MOUNT:" at 257.54,27.668 h1.52
  text "X" at 327.695,27.592 h1.52
  text "NONE" at 301.101,24.747 h1.27
  text "FOIL" at 318.881,24.747 h1.27
  text "LEGEND" at 330.311,24.747 h1.27
  text "REFER" at 341.614,24.747 h1.27
  text "MANUFACTURER'S ID/LOGO:" at 257.54,24.62 h1.52
  text "ISO9001/AS3901" at 304.911,21.699 h1.27
  text "NONE" at 341.614,21.699 h1.27
  text "MANUFACTURER'S ACCREDITATION:" at 257.54,21.572 h1.52
  text "X" at 302.244,21.572 h1.52
  text "PER ORDER" at 301.101,18.651 h1.27
  text "REFER" at 318.881,18.651 h1.27
  text "PACKAGING AND HANDLING:" at 257.54,18.524 h1.52
  text "X" at 298.434,18.397 h1.52
Sheet Detail:
  drawing of 1882 lines, arcs and shapes, not listed
  text "1" at 4.117,258.591 h1.78
  text "2" at 53.156,258.591 h1.78
  text "3" at 102.415,258.591 h1.78
  text "4" at 151.708,258.591 h1.78
  text "5" at 200.984,258.591 h1.78
  text "6" at 250.006,258.591 h1.78
  text "7" at 299.536,258.591 h1.78
  text "8" at 348.558,258.591 h1.78
  text "A" at -18.015,224.606 h1.78
  text "A" at 370.605,224.606 h1.78
  text "B" at -18.015,153.994 h1.78
  text "B" at 370.605,153.994 h1.78
  text "C" at -18.015,83.382 h1.78
  text "C" at 370.605,83.382 h1.78
  text "D" at -18.015,13.278 h1.78
  text "D" at 370.605,13.278 h1.78
  text "ENGINEER:" at 255.67,13.1 h1.14
  text "TITLE:" at 293.77,13.1 h1.14
  text "PCB DESIGNER:" at 255.67,5.607 h1.14
  text "DATE:" at 255.67,-2.14 h1.14
  text "PART NO.:" at 293.77,-2.14 h1.14
  text "REV:" at 347.11,-2.14 h1.14
  text "Altium Limited" at 222.65,-4.68 h1.78
  text ".PRINT_DATE" at 256.94,-5.188 h1.78
  text "12a Rodborough Rd" at 222.65,-7.22 h1.78
  text "Frenchs Forest" at 222.65,-9.76 h1.78
  text "FILE NAME:" at 255.67,-9.76 h1.14
  text "DWG NO:" at 293.77,-9.76 h1.14
  text "SCALE:" at 347.11,-9.76 h1.14
  text "NSW 2086" at 222.65,-12.3 h1.78
  text ".PCB_FILE_NAME_NO_PATH" at 256.94,-12.808 h1.78
  text "1" at 4.117,-18.269 h1.78
  text "2" at 53.156,-18.269 h1.78
  text "3" at 102.415,-18.269 h1.78
  text "4" at 151.708,-18.269 h1.78
  text "5" at 200.984,-18.269 h1.78
  text "6" at 250.006,-18.269 h1.78
  text "7" at 299.536,-18.269 h1.78
  text "8" at 348.558,-18.269 h1.78
Drill Drawing:
  text ".Legend" at 168,0 h0.75

## Dimensions
0,0 to 0,115.011 on Dimensions
0,0 to 165.1,0 on Dimensions

## Text inside footprints (layer, text, board x,y; h text height)
AltiumSerial: Top Overlay "REV 1.03" at 92.892,97.01 h1.3; Top Overlay "EB2" at 87.812,97.01 h1.3
HDR1: Top Overlay "2" at 82.423,8.128 h0.8 r90; Top Overlay "1" at 82.423,1.651 h0.8 r90; Top Overlay "19" at 105.283,0.508 h0.8 r90; Top Overlay "20" at 105.283,8.128 h0.8 r90; Top Overlay "16" at 100.203,8.128 h0.8 r90; Top Overlay "12" at 95.123,8.128 h0.8 r90; Top Overlay "6" at 87.503,8.128 h0.8 r90; Top Overlay "15" at 100.203,0.508 h0.8 r90; Top Overlay "11" at 95.123,0.889 h0.8 r90; Top Overlay "5" at 87.503,1.397 h0.8 r90; Top Overlay "3" at 84.963,1.397 h0.8 r90; Top Overlay "4" at 84.963,8.128 h0.8 r90; Top Overlay "7" at 90.043,1.397 h0.8 r90; Top Overlay "8" at 90.043,8.128 h0.8 r90; Top Overlay "9" at 92.583,1.397 h0.8 r90; Top Overlay "10" at 92.583,8.128 h0.8 r90; Top Overlay "13" at 97.663,0.508 h0.8 r90; Top Overlay "14" at 97.663,8.128 h0.8 r90; Top Overlay "17" at 102.743,0.508 h0.8 r90; Top Overlay "18" at 102.743,8.128 h0.8 r90
HDR2: Top Overlay "2" at 117.948,8.128 h0.8 r90; Top Overlay "1" at 117.948,1.651 h0.8 r90; Top Overlay "19" at 140.808,0.508 h0.8 r90; Top Overlay "20" at 140.808,8.128 h0.8 r90; Top Overlay "16" at 135.728,8.128 h0.8 r90; Top Overlay "12" at 130.648,8.128 h0.8 r90; Top Overlay "6" at 123.028,8.128 h0.8 r90; Top Overlay "15" at 135.728,0.508 h0.8 r90; Top Overlay "11" at 130.648,0.889 h0.8 r90; Top Overlay "5" at 123.028,1.397 h0.8 r90; Top Overlay "3" at 120.488,1.397 h0.8 r90; Top Overlay "4" at 120.488,8.128 h0.8 r90; Top Overlay "7" at 125.568,1.397 h0.8 r90; Top Overlay "8" at 125.568,8.128 h0.8 r90; Top Overlay "9" at 128.108,1.397 h0.8 r90; Top Overlay "10" at 128.108,8.128 h0.8 r90; Top Overlay "13" at 133.188,0.508 h0.8 r90; Top Overlay "14" at 133.188,8.128 h0.8 r90; Top Overlay "17" at 138.268,0.508 h0.8 r90; Top Overlay "18" at 138.268,8.128 h0.8 r90
J1C: Top Overlay "1" at 158.982,93.108 h0.8 r180; Top Overlay "14" at 160.125,90.568 h0.8 r180; Top Overlay "13" at 124.819,93.108 h0.8 r180; Top Overlay "26" at 124.819,90.568 h0.8 r180
J2: Mechanical 15 "PCB Edge" at 122.55,114.5 h0.25
J3: Mechanical 15 "PCB Edge" at 140.15,114.5 h0.25
J4: Top Overlay "1" at 21.336,105.156 h0.8; Top Overlay "5" at 32.893,105.156 h0.8; Top Overlay "9" at 31.242,107.95 h0.8; Top Overlay "6" at 22.86,107.95 h0.8
J5: Top Overlay "11" at 60.198,105.664 h0.8; Top Overlay "5" at 72.771,100.457 h0.8; Top Overlay "15" at 72.644,105.664 h0.8; Top Overlay "1" at 60.96,100.457 h0.8
U2C: Top Overlay "1" at 7.36,69.025 h0.8; Top Overlay "3" at 12.182,69.025 h0.8; Top Overlay "2" at 9.642,68.982 h0.8
U3C: Top Overlay "1" at 146.475,23.245 h0.8 r90; Top Overlay "3" at 146.475,28.067 h0.8 r90; Top Overlay "2" at 146.518,25.527 h0.8 r90